# Altium PCB TAUV-Disconnect.PcbDoc
Units mil, origin at the board's own origin, x right, y up, seen from the top; angles counter-clockwise.
Board outline 4909.85 x 4909.92 mil, 2 copper layers (Top Layer, Bottom Layer); 34 components, 72 nets, 212 pads, 0 vias.
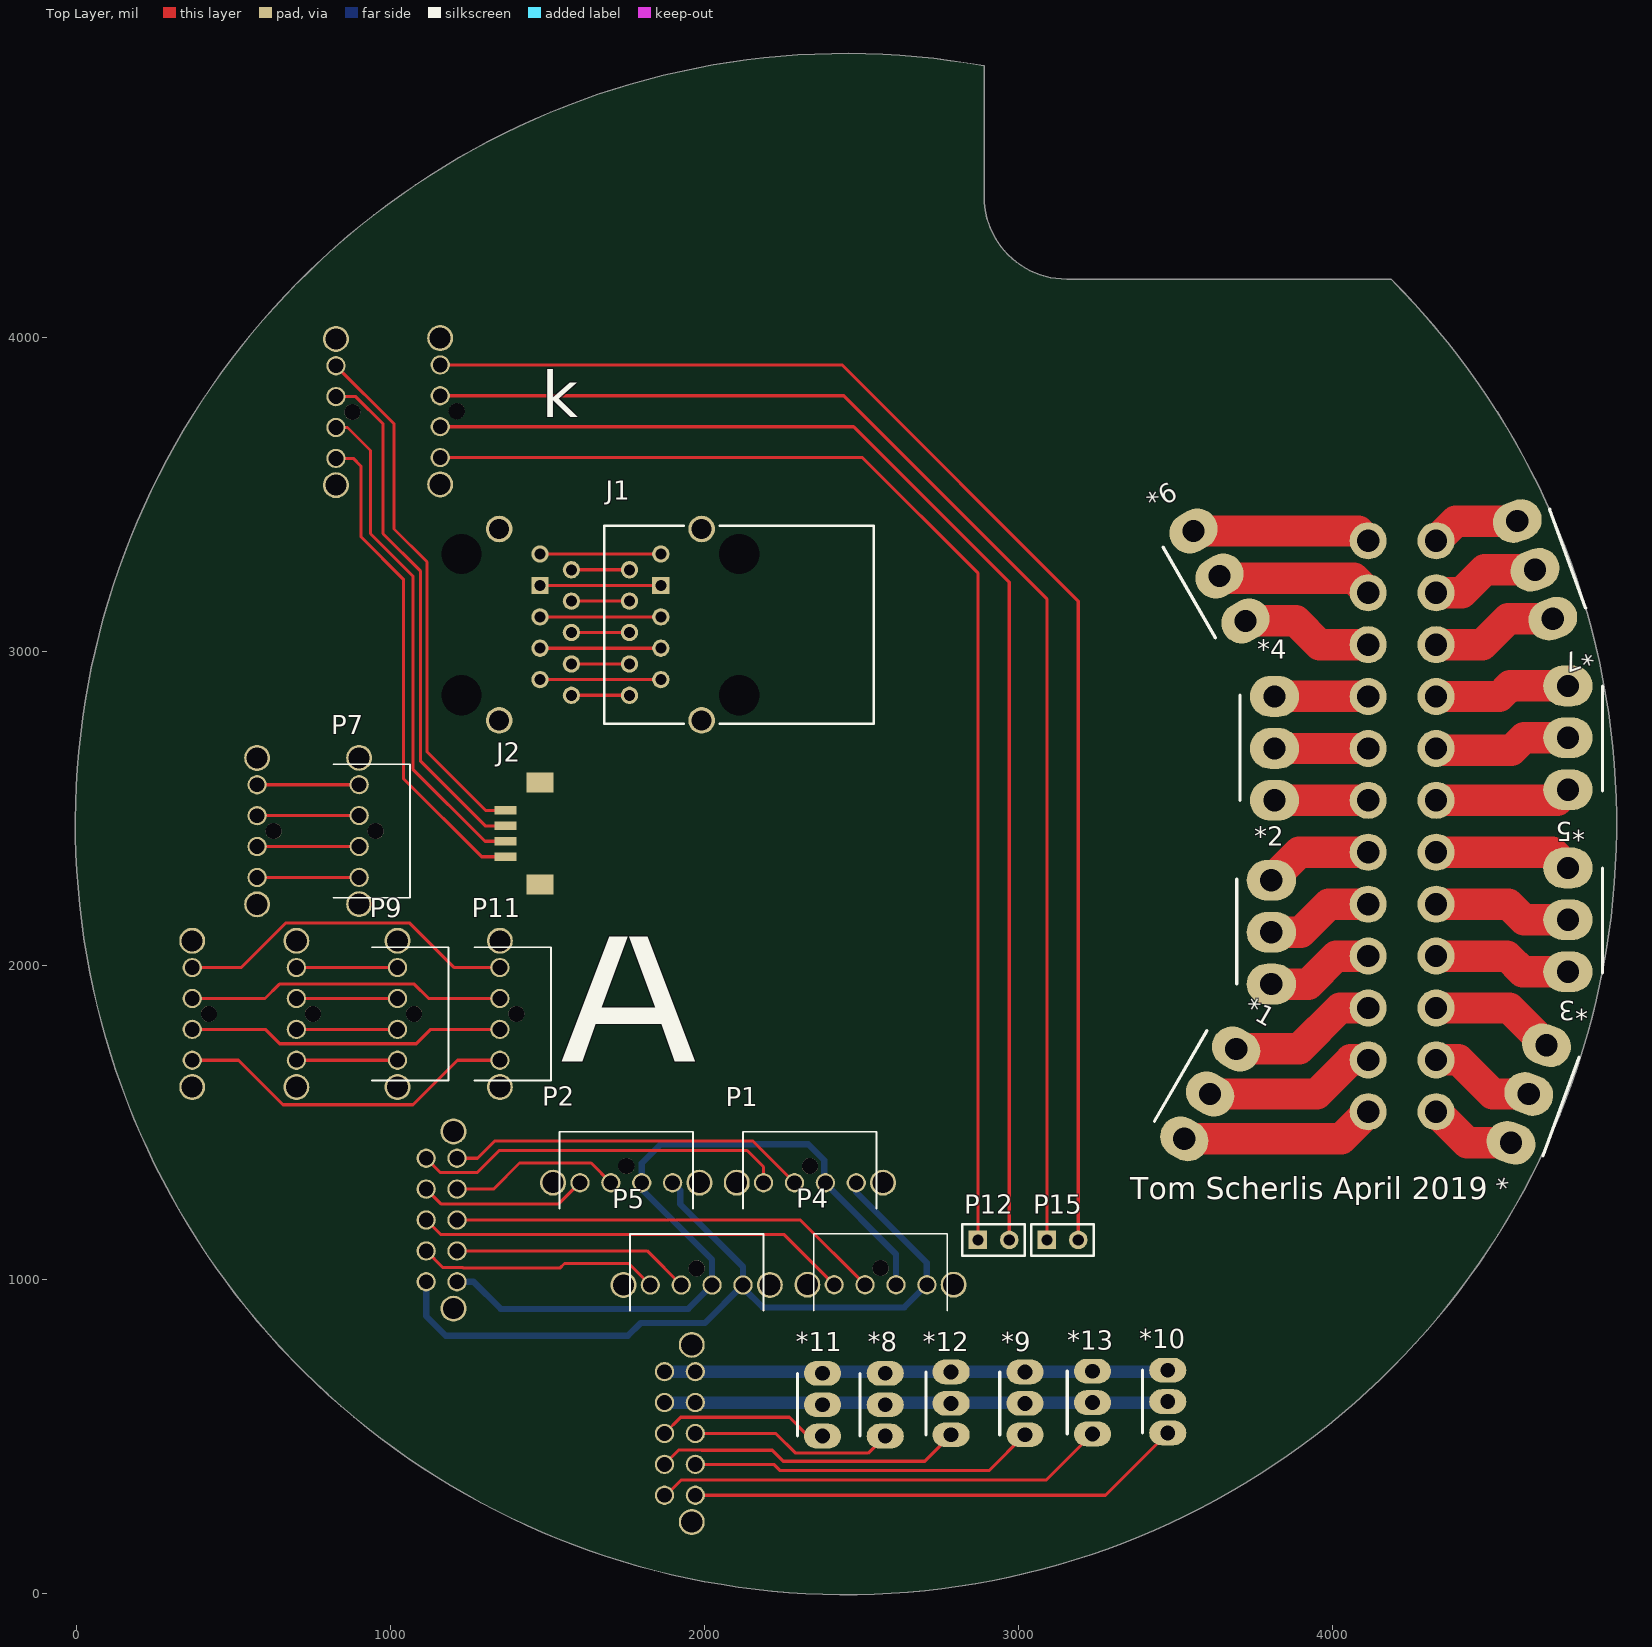
[diagram p0: Top Layer view]
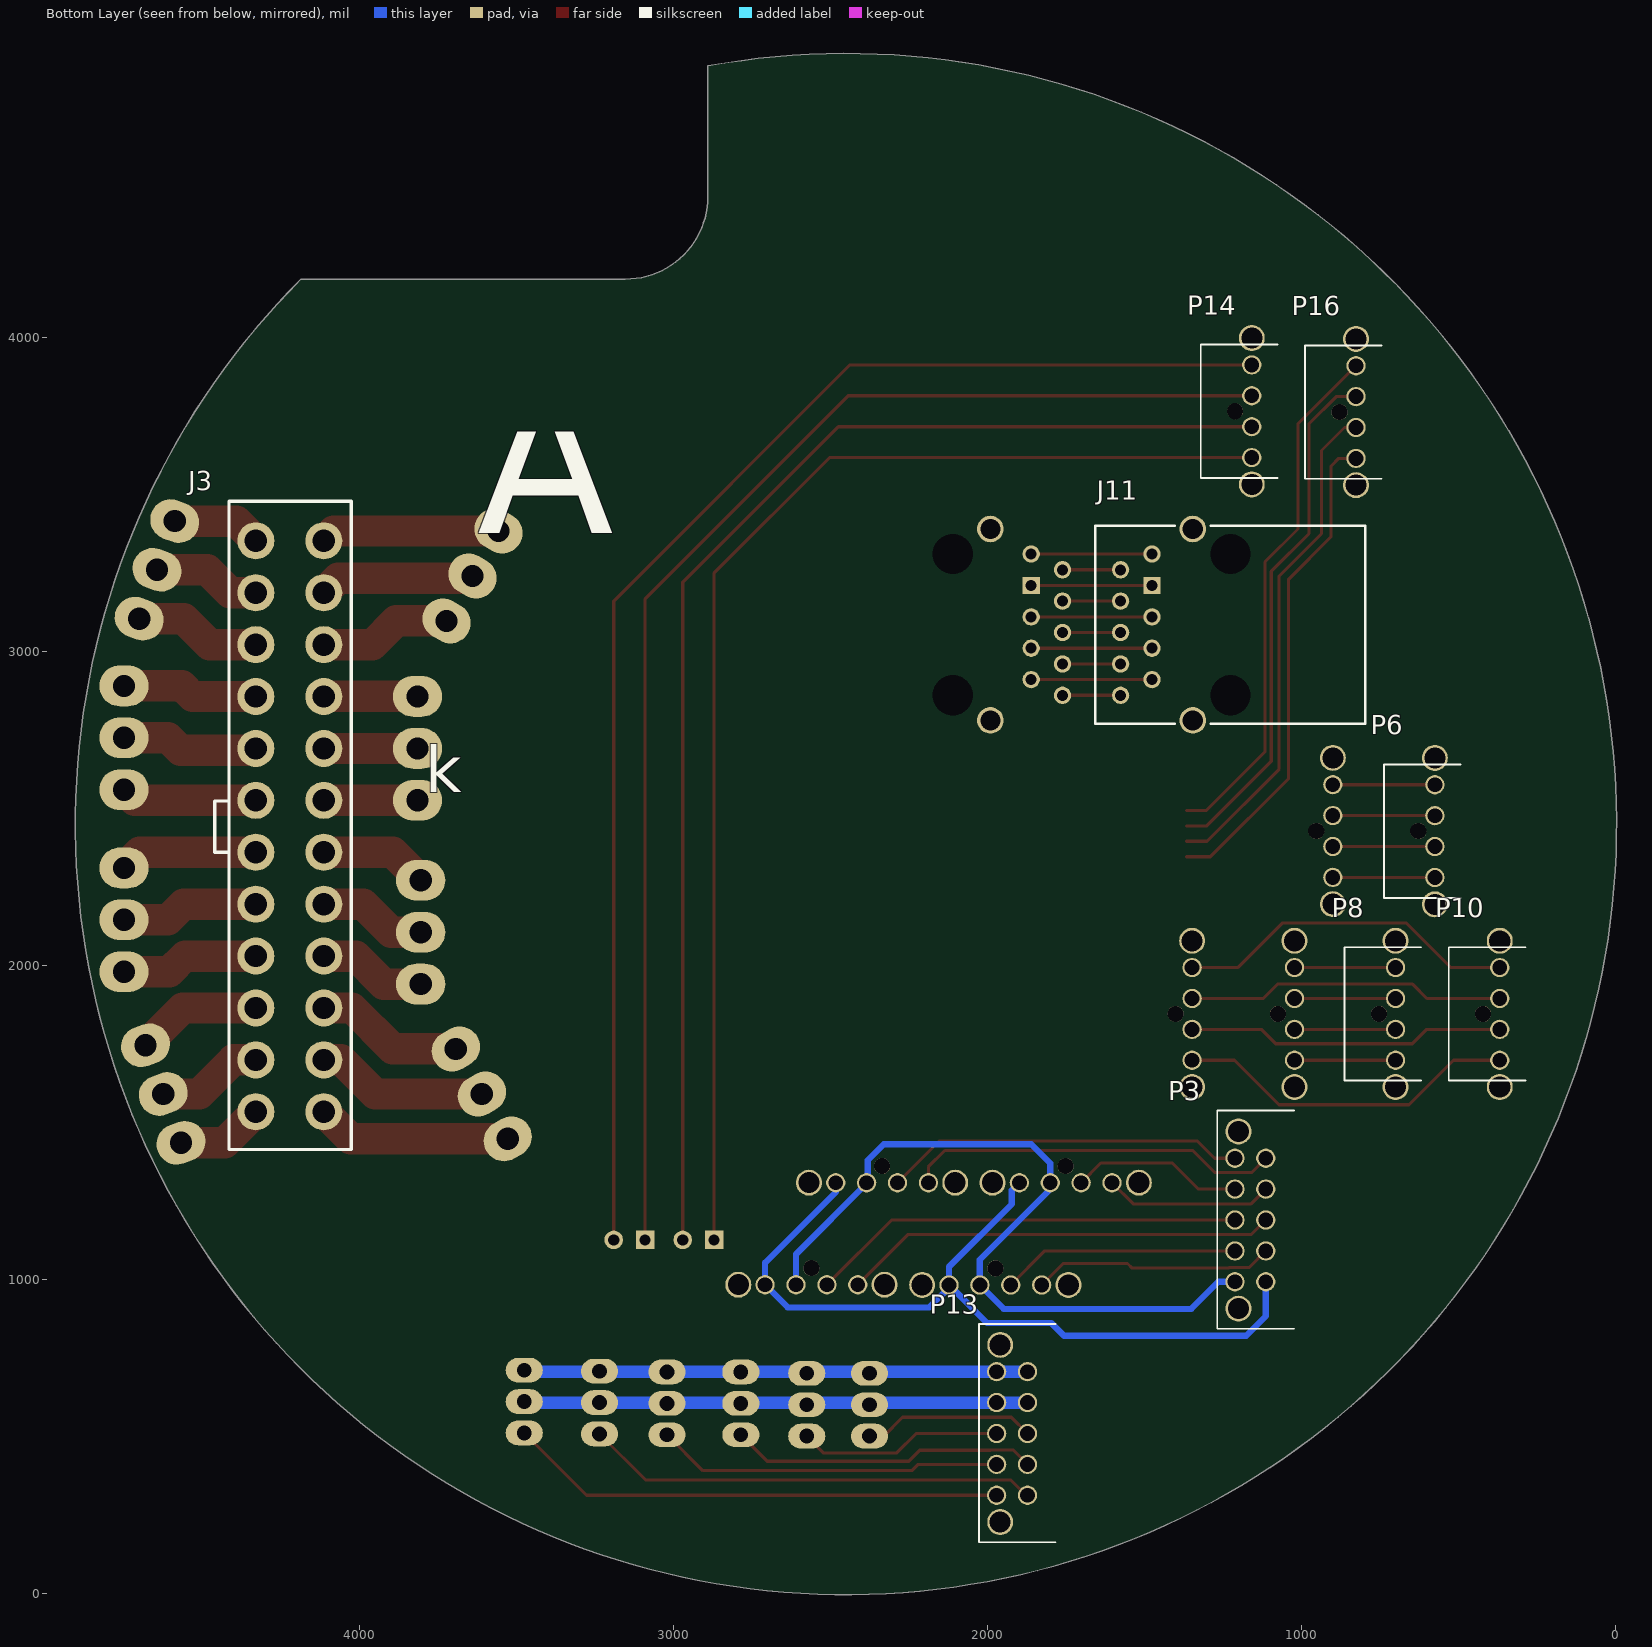
[diagram p1: Bottom Layer view, seen from below]

## Layer stack, top to bottom
Top Solder: solder mask 0.4, Solder Resist, Dk 3.5
Top Layer: signal copper 1.4
Dielectric 1: dielectric 12.6, FR-4, Dk 4.8
Bottom Layer: signal copper 1.4
Bottom Solder: solder mask 0.4, Solder Resist, Dk 3.5

## Board outline
2890.04,4865.25 ccw(c2450,2450) 4185.95,4185.95 3152.91,4185.95 cw(c3152.91,4448.81) 2890.04,4448.81

## Design rules (kind name [scope] priority, off if disabled: settings)
Clearance [All] p1: gap=10 ignorepadtopadclearanceinfootprint=FALSE except(0: Arc-Hole Track-Hole SMDPad-Hole THPad-Hole Via-Hole Fill-Hole Poly-Hole Region-Hole Text-Hole)
Height [All] p1: minheight=0 maxheight=3000 prefheight=500
PolygonConnect [All] p1: connectstyle=Relief reliefconductorwidth=10 reliefentries=4 polygonreliefangle="90 Angle" airgapwidth=10
RoutingVias [All] p1: holewidth=28 width=50 viastyle="Through Hole" minholewidth=28 minwidth=50 maxholewidth=28 maxwidth=50
SolderMaskExpansion [All] p1: expansion=4
Width [All] p1: maxlimit=100 minlimit=10 preferedwidth=10
29 further rules are at their usual default settings.

## Components (designator, comment, footprint, x,y, rotation, side; value= is the part's Value field where it differs from the comment)
* "3-pin solder holes" "3-PIN SOLDER HOLES" 4625,1590 r250 top
*1 "3-pin solder holes" "3-PIN SOLDER HOLES" 3610,1590 r60 top
*2 "3-pin solder holes" "3-PIN SOLDER HOLES" 3805,2105 r90 top
*3 "3-pin solder holes" "3-PIN SOLDER HOLES" 4750,2145 r270 top
*4 "3-pin solder holes" "3-PIN SOLDER HOLES" 3815,2690.71 r90 top
*5 "3-pin solder holes" "3-PIN SOLDER HOLES" 4750,2725 r270 top
*6 "3-pin solder holes" "3-PIN SOLDER HOLES" 3640,3240 r120 top
*7 "3-pin solder holes" "3-PIN SOLDER HOLES" 4645,3260 r290 top
*8 "3-pin solder holes" "3-PIN SOLDER HOLES - small" 2575,600 r90 top
*9 "3-pin solder holes" "3-PIN SOLDER HOLES - small" 3020,604.29 r90 top
*10 "3-pin solder holes" "3-PIN SOLDER HOLES - small" 3475,610 r90 top
*11 "3-pin solder holes" "3-PIN SOLDER HOLES - small" 2375,600 r90 top
*12 "3-pin solder holes" "3-PIN SOLDER HOLES - small" 2785,604.29 r90 top
*13 "3-pin solder holes" "3-PIN SOLDER HOLES - small" 3235,606.85 r90 top
J1 "7499111001A" WE-7499111001A_V 1935,3085 r270 top
J2 "DF13" "4-pin DF13 vertical smd" 1497.68,2345.79 r90 top
J3 "24-pin minifit" "24-PIN MINIFIT VERT" 3826.06,1533.23 r90 bottom
J11 "7499111001A" WE-7499111001A_V 1400,3085 r270 bottom
P1 "4-Pin Molex Nano-Fit" "MOLEX NANO-FIT 1X4 - Vertical" 2482.64,1307.24 r180 top
P2 "4-Pin Molex Nano-Fit" "MOLEX NANO-FIT 1X4 - Vertical" 1897.64,1307.24 r180 top
P3 "10-Pin 5x2 Molex Nano-Fit Vertical" "MOLEX NANO-FIT 2x5 - Vertical" 1210.94,1385.28 r270 bottom
P4 "4-Pin Molex Nano-Fit" "MOLEX NANO-FIT 1X4 - Vertical" 2707.64,982.24 r180 top
P5 "4-Pin Molex Nano-Fit" "MOLEX NANO-FIT 1X4 - Vertical" 2121.85,981.54 r180 top
P6 "4-Pin Molex Nano-Fit" "MOLEX NANO-FIT 1X4 - Vertical" 574.01,2575 r270 bottom
P7 "4-Pin Molex Nano-Fit" "MOLEX NANO-FIT 1X4 - Vertical" 899.01,2280 r90 top
P8 "4-Pin Molex Nano-Fit" "MOLEX NANO-FIT 1X4 - Vertical" 699.01,1992.64 r270 bottom
P9 "4-Pin Molex Nano-Fit" "MOLEX NANO-FIT 1X4 - Vertical" 1021.26,1697.36 r90 top
P10 "4-Pin Molex Nano-Fit" "MOLEX NANO-FIT 1X4 - Vertical" 367.24,1992.64 r270 bottom
P11 "4-Pin Molex Nano-Fit" "MOLEX NANO-FIT 1X4 - Vertical" 1347.24,1697.36 r90 top
P12 "Header 2" HDR1X2 2870,1125 r0 top
P13 "10-Pin 5x2 Molex Nano-Fit Vertical" "MOLEX NANO-FIT 2x5 - Vertical" 1970,705.28 r270 bottom
P14 "4-Pin Molex Nano-Fit" "MOLEX NANO-FIT 1X4 - Vertical" 1157.24,3912.64 r270 bottom
P15 "Header 2" HDR1X2 3090,1125 r0 top
P16 "4-Pin Molex Nano-Fit" "MOLEX NANO-FIT 1X4 - Vertical" 825,3910 r270 bottom

## Footprints (in the part's own frame and the unit in brackets; to place one, negate y for a bottom-side part, rotate by r counter-clockwise, add the part's x,y. Pads: shape width x height; smd on the part's side, far side on the other; paste and mask are expansions set on the pad)
"3-PIN SOLDER HOLES" [mm]
  oval 3.3x4 hole 1.8 unplated: 1(4.209,0) 2(0,0) 3(-4.191,0)
  silkscreen extent -4.19,2.79 4.32,2.79, body extent 12.45,8.51 12.45,8.51, height 8.9
"3-PIN SOLDER HOLES - small" [mm]
  oval 2x3 hole 1.2 unplated: 1(2.54,0) 2(0,0) 3(-2.54,0)
  silkscreen extent -2.54,2.03 2.54,2.03, body extent 12.45,8.51 12.45,8.51, height 8.9
"4-pin DF13 vertical smd" [mm]
  rect 0.7x1.8 smd: 1(0,3.37) 2(1.25,3.37) 3(2.5,3.37) 4(3.75,3.37)
  rect 1.6x2.2 smd: 5(-2.25,0.57) 5(6,0.57)
  body extent -2.92,-1.09 6.73,3.81, height 4.82
"24-PIN MINIFIT VERT" [mm]
  round 3 hole 1.8 unplated: 1(46.2,7.3) 2(42,7.3) 3(37.8,7.3) 4(33.6,7.3) 5(29.4,7.3) 6(25.2,7.3) 7(21,7.3) 8(16.8,7.3) 9(12.6,7.3) 10(8.4,7.3) 11(4.2,7.3) 12(0,7.3) 13(46.2,12.8) 14(42,12.8) 15(37.8,12.8) 16(33.6,12.8) 17(29.4,12.8) 18(25.2,12.8) 19(21,12.8) 20(16.8,12.8) 21(12.6,12.8) 22(8.4,12.8) 23(4.2,12.8) 24(0,12.8)
  silkscreen extent -3.05,5.08 49.4,16.13, body extent -2.96,4.11 49.44,18.51, height 32.7
HDR1X2 [mm] "Connector; Header; 2 Position"
  rect 1.5x1.5 hole 0.9: 1(0,0)
  round 1.5 hole 0.9: 2(2.54,0)
  silkscreen extent -1.27,-1.27 3.81,1.27
"MOLEX NANO-FIT 1X4 - Vertical" [mm] "MOLEX NANO-FIT 1X4 - Vertical with Solder Clips"
  round 1.56 hole 1.2: 1(0,0) 2(2.5,0) 3(5,0) 4(7.5,0)
  round 2.1 hole 1.7: ""(-2.17,0) ""(9.67,0)
  round 1.3 hole 1.3 unplated: ""(3.75,-1.34)
  silkscreen extent -1.65,-4.13 9.15,2.07, body extent -2.86,-5.45 10.36,2.51, height 25.05
"MOLEX NANO-FIT 2x5 - Vertical" [mm] "MOLEX NANO-FIT 2X5 - Vertical with Solder Clips"
  round 1.56 hole 1.2: 1(0,0) 2(2.5,0) 3(5,0) 4(7.5,0) 5(10,0) 6(0,2.5) 7(2.5,2.5) 8(5,2.5) 9(7.5,2.5) 10(10,2.5)
  round 2.1 hole 1.7: 11(-2.17,0.29) 11(12.17,0.29)
  silkscreen extent -3.85,-1.43 13.8,4.77, body extent -2.76,-5.66 12.96,4.8, height 26.85
WE-7499111001A_V [mm] "THD, 10-Leads, Body 21.84x16mm"
  rect 1.4x1.4 hole 0.89: 1(-3.175,-1.905)
  round 1.4 hole 0.89: 2(-1.905,-4.445) 3(0.635,-4.445) 4(1.905,-1.905) 5(-0.635,-1.905) 6(3.175,-4.445) 7(4.445,-1.905) 8(5.715,-4.445) 9(-4.445,-4.445) 10(-5.715,-1.905)
  round 0 hole 3.25 unplated: MH1(-5.715,4.445) MH2(5.715,4.445)
  round 2.15 hole 1.63: S1(-7.745,1.395) S2(7.745,1.395)
  silkscreen extent -8,-6.49 8,15.35, body extent -9.22,-6.26 9.22,15.34, height 14.82

## Part data
J1 J11: library part CMP-1710-00001-3, "RJ45 LAN Transformer, Modular JACK, 0 to 70 degC, 10-Pin THD, RoHS, Tube", ComponentLink1Description="Manufacturer URL", ComponentLink1URL=https://www.we-online.com/, ComponentLink2Description=Datasheet, ComponentLink2URL=https://katalog.we-online.de/pbs/datasheet/7499111001A.pdf, DatasheetVersion="Rev. 01", Mounting Technology="Through Hole", PackageDescription="10-Pin Through Hole Device, Body 21.84 x 16 mm", PartNumber=7499111001A, RoHSCompliant=False
J2: library part "4-pin DF13 vertical smd", "H126000CT-ND"
J3: library part "24-pin minifit RA", "RA: WM21362-ND / VERT: WM3811-ND"
P1 P2 P4 P5 P6 P7 P8 P9 P10 P11 P14 P16: library part "4-Pin Nano-Fit Throughole Vertical", "NanoFit ST Hdr TH SR 4Ckt", Manufacturer=Molex, Part Number=105313-1204, Supplier Part Number=538-105313-1204, Supplier=Mouser
P3 P13: library part "10-Pin 2-Row Nano-Fit_Vertical", "NanoFit VT Hdr TH DR 10Ckt", Manufacturer=Molex, Part Number=105314-1216, Supplier Part Number=WM15165-ND, Supplier Part Number 1=WM15120-ND, ComponentLink1Description="Digikey Link", ComponentLink1URL=https://www.digikey.com/product-detail/en/molex-llc/1053121310/WM15120-ND/6164209, Supplier=Digi-Key, Supplier 1=Digi-Key
P12 P15: "Header, 2-Pin", LatestRevisionDate=17-Jul-2002, LatestRevisionNote="Re-released for DXP Platform.", Publisher="Altium Limited"

## Nets (pads, with @x,y where several pads share a name; then routed paths per layer and width w, separated by ;. In a path a pad name is that pad's centre, name@x,y a point inside that pad or via, vN(x,y) a via of type N, cw(c..) or ccw(c..) an arc to the next point about the centre after c; other vN are vias at no path point)
GND: *8.1 *9.1 *10.1 *11.1 *12.1 *13.1 P13.1 P13.6 | length 1605.4
  Bottom Layer w40: P13.6 P13.1 3470.28,705.28 *10.1
H_GND: P1.2 P2.2 P3.5 P4.2 P5.2 | length 2503.2
  Top Layer w10: P5.2@2040.16,981.54 P5.2@2045.16,976.54 ; P4.2@2604.37,978.03 P4.2@2610.16,972.24
  Bottom Layer w20: P3.5 1263.43,991.57 1349.8,905.2 1947.09,905.2 P5.2 2023.43,1061.57 1799.21,1285.79 P2.2 1799.21,1369.21 1860,1430 2329.47,1430 2380.59,1378.88 2380.59,1308.62 2609.21,1080 P4.2 2604.21,987.24 P4.2@2605.59,987.24
H_PWR: P1.1 P2.1 P3.10 P4.1 P5.1 | length 2720.6
  Top Layer w10: P5.1@2138.58,981.54 P5.1@2143.58,976.54 ; P4.1@2702.8,978.03 P4.1@2708.58,972.24
  Bottom Layer w20: P3.10 1112.52,882.48 1175,820 1755.32,820 1795.32,860 2000.32,860 P5.1 ; P2.1 1921.73,1283.15 1921.73,1239.22 2121.85,1039.11 P5.1 ; P1.1@2487.64,1302.24 P1.1 2482.64,1277.36 2707.64,1052.36 P4.1 2635.39,910 2185,910 2121.85,973.15 P5.1
Net*1_1: *1.1 J3.10 | length 474.6
  Top Layer w100: *1.1 3893.51,1733.51 4023.94,1863.94 J3.10
Net*1_2: *1.2 J3.11 | length 548.4
  Top Layer w100: *1.2 3950,1590 4058.58,1698.58 J3.11
Net*1_3: *1.3 J3.12 | length 621.6
  Top Layer w100: *1.3 4027.34,1447.11 J3.12
Net*2_1: *2.1 J3.7 | length 345.5
  Top Layer w100: *2.1 3894.29,2360 J3.7
Net*2_2: *2.2 J3.8 | length 345.6
  Top Layer w100: *2.2 3898.58,2105 3988.23,2194.65 J3.8
Net*2_3: *2.3 J3.9 | length 345.5
  Top Layer w100: *2.3 3922.36,1940 4011.65,2029.29 J3.9
Net*3_1: *3.1 J3.21 | length 440.7
  Top Layer w100: J3.21 4555.71,2029.29 4605.71,1979.29 *3.1
Net*3_2: *3.2 J3.20 | length 440.6
  Top Layer w100: J3.20 4560.35,2194.65 4610,2145 *3.2
Net*3_3: *3.3 J3.19 | length 440.7
  Top Layer w100: J3.19 4700,2360 *3.3
Net*4_1: *4.1 J3.4 | length 298.6
  Top Layer w100: *4.1 4113.11,2856.42 J3.4
Net*4_2: *4.2 J3.5 | length 298.5
  Top Layer w100: *4.2 J3.5
Net*4_3: *4.3 J3.6 | length 298.6
  Top Layer w100: *4.3 4113.11,2525.71 J3.6
Net*5_1: *5.1 J3.18 | length 434.1
  Top Layer w100: J3.18 4716.06,2525.35 *5.1
Net*5_2: *5.2 J3.17 | length 438.9
  Top Layer w100: J3.17 4335.71,2685 4570,2685 4610,2725 *5.2
Net*5_3: *5.3 J3.16 | length 434.1
  Top Layer w100: J3.16 4531.77,2856.06 4565.71,2890 *5.3
Net*6_1: *6.1 J3.1 | length 569.3
  Top Layer w100: *6.1 4082.08,3383.51 J3.1
Net*6_2: *6.2 J3.2 | length 499.6
  Top Layer w100: *6.2 3640,3233.07 4067.17,3233.07 J3.2
Net*6_3: *6.3 J3.3 | length 422.3
  Top Layer w100: *6.3 3882.89,3097.11 3958.58,3021.42 J3.3
Net*7_1: *7.1 J3.15 | length 406
  Top Layer w100: J3.15 4476.42,3021.42 4559.28,3104.28 *7.1
Net*7_2: *7.2 J3.14 | length 345.3
  Top Layer w100: J3.14 4411.77,3186.77 4485,3260 *7.2
Net*7_3: *7.3 J3.13 | length 284.6
  Top Layer w100: J3.13 4392.92,3415.05 *7.3
Net*8_3: *8.3 P13.3 | length 653.5
  Top Layer w10: P13.3 2226.57,508.43 2289.37,445.63 2520.63,445.63 *8.3
Net*9_3: *9.3 P13.4 | length 1105.6
  Top Layer w10: P13.4 2220,410 2240,390 2905.71,390 *9.3
Net*10_3: *10.3 P13.5 | length 1587.2
  Top Layer w10: P13.5 3276.57,311.57 *10.3
Net*11_3: *11.3 P13.8 | length 549.6
  Top Layer w10: P13.8 1923.15,560 2270,560 2330,500 *11.3
Net*12_3: *12.3 P13.9 | length 982.1
  Top Layer w10: P13.9 1917.28,455.71 1988.93,455.71 1989.64,455 2215,455 2250,420 2700.71,420 *12.3
Net*13_3: *13.3 P13.10 | length 1444.3
  Top Layer w10: P13.10 1876.57,311.57 1925,360 3088.15,360 *13.3
Net*_1: *.1 J3.24 | length 279.3
  Top Layer w100: J3.24 4428.94,1434.28 *.1
Net*_2: *.2 J3.23 | length 340
  Top Layer w100: J3.23 4401.42,1698.58 4510,1590 *.2
Net*_3: *.3 J3.22 | length 400.7
  Top Layer w100: J3.22 4562.55,1863.94 *.3
NetJ1_1: J1.1 J11.1 | length 385
  Top Layer w10: J11.1 J1.1
NetJ1_2: J1.2 J11.2 | length 185
  Top Layer w10: J11.2 J1.2
NetJ1_3: J1.3 J11.3 | length 185
  Top Layer w10: J11.3 J1.3
NetJ1_4: J1.4 J11.4 | length 385
  Top Layer w10: J11.4 J1.4
NetJ1_5: J1.5 J11.5 | length 385
  Top Layer w10: J11.5 J1.5
NetJ1_6: J1.6 J11.6 | length 185
  Top Layer w10: J11.6 J1.6
NetJ1_7: J1.7 J11.7 | length 385
  Top Layer w10: J11.7 J1.7
NetJ1_8: J1.8 J11.8 | length 185
  Top Layer w10: J11.8 J1.8
NetJ1_9: J1.9 J11.9 | length 185
  Top Layer w10: J11.9 J1.9
NetJ1_10: J1.10 J11.10 | length 385
  Top Layer w10: J11.10 J1.10
NetJ2_1: J2.1 P16.4 | length 1569.4
  Top Layer w10: P16.4 880.28,3614.72 905,3590 905,3365 1040,3230 1040,2595 1289.21,2345.79 J2.1
NetJ2_2: J2.2 P16.3 | length 1601.5
  Top Layer w10: P16.3 861.85,3713.15 935,3640 935,3375 1070,3240 1070,2625 1300,2395 J2.2
NetJ2_3: J2.3 P16.2 | length 1665.8
  Top Layer w10: P16.2 888.43,3811.57 975,3725 975,3375 1095,3255 1095,2650 1300.79,2444.21 J2.3
NetJ2_4: J2.4 P16.1 | length 1677.4
  Top Layer w10: P16.1 1010,3725 1010,3390 1115,3285 1115,2680 1301.57,2493.43 J2.4
NetP1_3: P1.3 P3.1 | length 1152.5
  Top Layer w10: P3.1 1276.14,1385.28 1330.87,1440 2153.03,1440 P1.3
NetP1_4: P1.4 P3.6 | length 1195
  Top Layer w10: P3.6 1158.23,1339.57 1274.57,1339.57 1345,1410 2135,1410 2187.36,1357.64 P1.4
NetP2_3: P2.3 P3.2 | length 550.3
  Top Layer w10: P3.2 1326.85,1286.85 1410,1370 1638.03,1370 P2.3
NetP2_4: P2.4 P3.7 | length 537.1
  Top Layer w10: P3.7 1159.37,1240 1535.12,1240 P2.4
NetP3_3: P3.3 P4.3 | length 1385.2
  Top Layer w10: P3.3 2304.61,1188.43 P4.3
NetP3_4: P3.4 P5.3 | length 759
  Top Layer w10: P3.4 1816.54,1090 P5.3
NetP3_8: P3.8 P4.4 | length 1385.2
  Top Layer w10: P3.8 1158.23,1142.72 2251.89,1142.72 P4.4
NetP3_9: P3.9 P5.4 | length 771.4
  Top Layer w10: P3.9 1165.24,1037.28 1229.88,1037.28 1232.16,1035 1538.11,1035 1553.11,1050 1758.11,1050 P5.4
NetP6_1: P6.1 P7.4 | length 325.1
  Top Layer w10: P6.1 898.74,2575 P7.4
NetP6_2: P6.2 P7.3 | length 325.1
  Top Layer w10: P6.2 574.29,2476.85 P7.3
NetP6_3: P6.3 P7.2 | length 325.1
  Top Layer w10: P6.3 898.74,2378.15 P7.2
NetP6_4: P6.4 P7.1 | length 325.1
  Top Layer w10: P6.4 574.29,2280 P7.1
NetP8_1: P8.1 P9.4 | length 322.2
  Top Layer w10: P8.1 P9.4
NetP8_2: P8.2 P9.3 | length 322.2
  Top Layer w10: P8.2 P9.3
NetP8_3: P8.3 P9.2 | length 322.2
  Top Layer w10: P8.3 P9.2
NetP8_4: P8.4 P9.1 | length 322.2
  Top Layer w10: P8.4 P9.1
NetP10_1: P10.1 P11.4 | length 1097.4
  Top Layer w10: P10.1 522.64,1992.64 664.41,2134.41 1060.59,2134.41 1202.36,1992.64 P11.4
NetP10_2: P10.2 P11.3 | length 1017.9
  Top Layer w10: P10.2 599.21,1894.21 644.92,1939.92 1075.08,1939.92 1120.79,1894.21 P11.3
NetP10_3: P10.3 P11.2 | length 1017.9
  Top Layer w10: P10.3 600,1795.79 645.71,1750.08 1080.87,1750.08 1126.57,1795.79 P11.2
NetP10_4: P10.4 P11.1 | length 1097.4
  Top Layer w10: P10.4 514.57,1697.36 656.34,1555.59 1070.59,1555.59 1212.36,1697.36 P11.1
NetP12_1: P12.1 P14.4 | length 3989.9
  Top Layer w10: P14.4 2502.64,3617.36 2870,3250 P12.1
NetP12_2: P12.2 P14.3 | length 4113.1
  Top Layer w10: P14.3 2474.21,3715.79 2970,3220 P12.2
NetP14_1: P14.1 P15.2 | length 4379.5
  Top Layer w10: P14.1 2437.36,3912.64 3190,3160 P15.2
NetP14_2: P14.2 P15.1 | length 4243.1
  Top Layer w10: P14.2 2443.15,3814.21 3090,3167.36 P15.1
VCC5: *8.2 *9.2 *10.2 *11.2 *12.2 *13.2 P13.2 P13.7 | length 1604.7
  Bottom Layer w40: P13.7 P13.2 *13.2 3471.85,606.85 *10.2
pads on no net: J1.MH1 J1.MH2 J1.S1 J1.S2 J2.5 J11.MH1 J11.MH2 J11.S1 J11.S2 P1. P2. P3.11 P4. P5. P6. P7. P8. P9. P10. P11. P13.11 P14. P16.

## Silkscreen, mask and mechanical layers (free items; w line width, h text height)
Top Overlay:
  text "k" at 1480,3700 h250
  text "A" at 1540,1445 h1300
  text "Tom Scherlis April 2019" at 3355,1230 h120
Bottom Overlay:
  text "A" at 3625,3055 h1700
  text "k" at 3790,2505 h250
Mechanical 1:
  lines w10: 2455,5 cw(c2455,2455) 5,2455 cw(c2455,2455) 2455,4905 ; 2455,10 ccw(c2455,2460) 4905,2460 ; 2890.04,4865.25 2890.04,4448.81 ccw(c3152.91,4448.81) 3152.91,4185.95 4185.95,4185.95 ; 2890.04,4870.25 ccw(c2450,2455) 4185.95,4190.95
Mechanical 7:
  circle w10: c2450,2450 r790
  circle w10: c2450,2450 r1245
  circle w10: c2450,2455 r2360
  circle w10: c2450,2450 r1620